# Altium PCB KC_BaseBoard4CompareTest-V0.2-XLR.PcbDoc
Units mil, origin at the board's own origin, x right, y up, seen from the top; angles counter-clockwise.
Board outline 7040 x 5160 mil, 2 copper layers (Top Layer, Bottom Layer); 70 components, 46 nets, 169 pads, 5 vias.
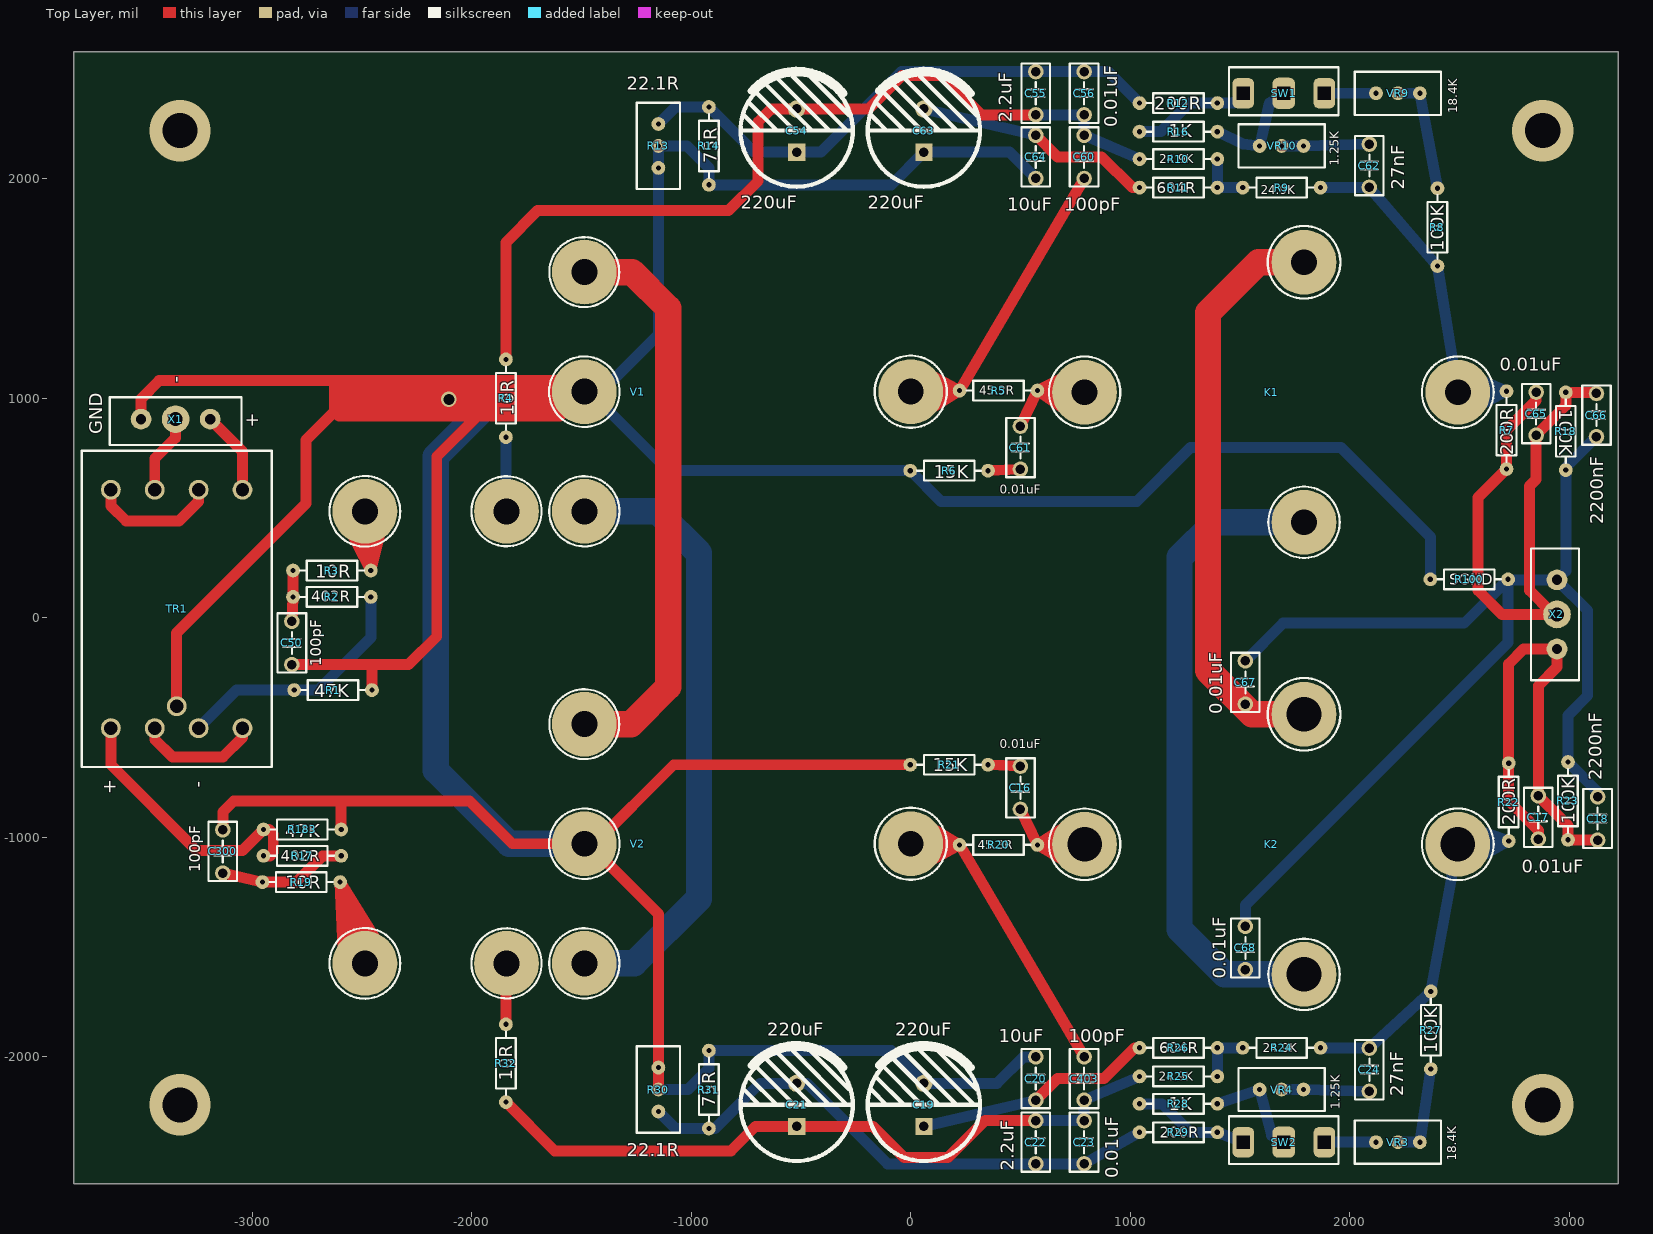
[diagram p0: Top Layer view]
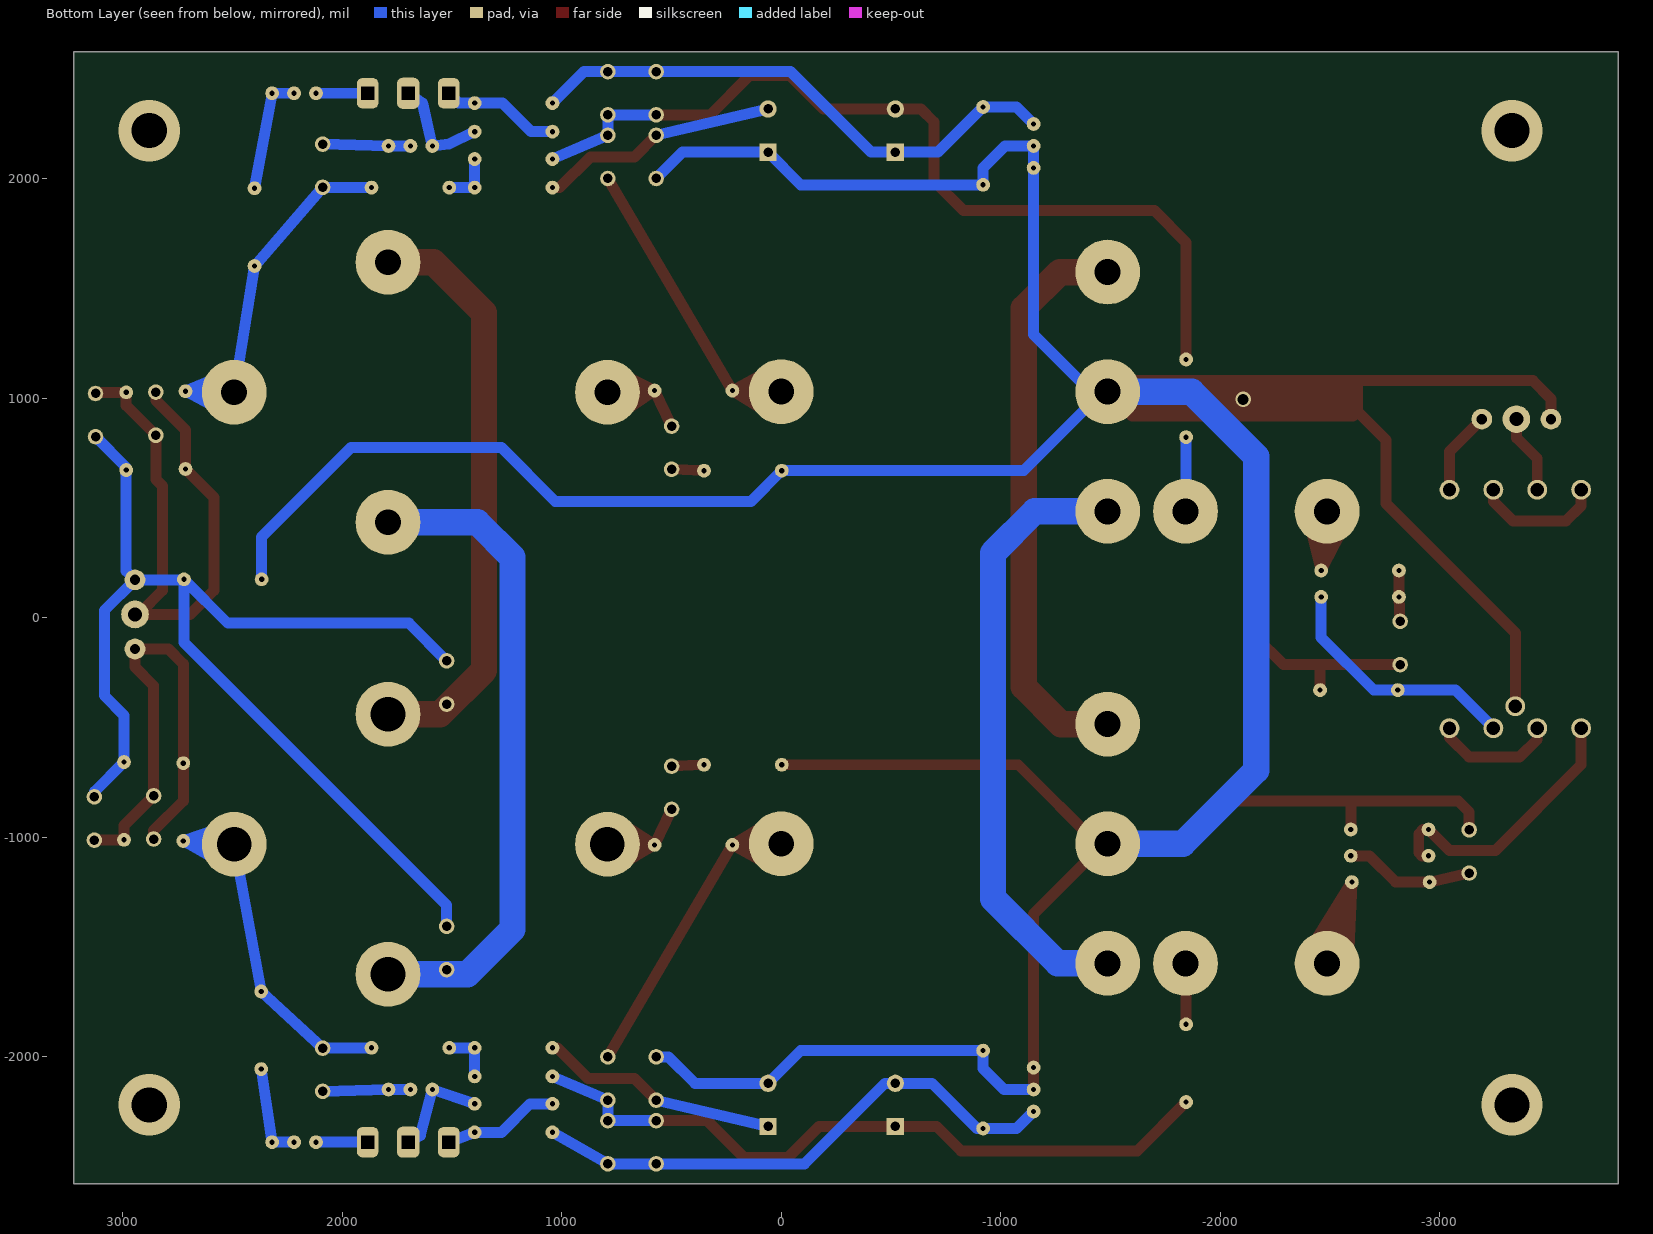
[diagram p1: Bottom Layer view, seen from below]

## Layer stack, top to bottom
Top Solder: solder mask 0.4, Solder Resist, Dk 3.5
Top Layer: signal copper 1.4
Dielectric 1: dielectric 12.6, FR-4, Dk 4.8
Bottom Layer: signal copper 1.4
Bottom Solder: solder mask 0.4, Solder Resist, Dk 3.5

## Board outline
-3815,-2580 -3815,2580 3225,2580 3225,-2580

## Design rules (kind name [scope] priority, off if disabled: settings)
Clearance [All] p1: gap=10 ignorepadtopadclearanceinfootprint=FALSE except(0: Arc-Hole Track-Hole SMDPad-Hole THPad-Hole Via-Hole Fill-Hole Poly-Hole Region-Hole Text-Hole)
PolygonConnect [All] p1: connectstyle=Relief reliefconductorwidth=10 reliefentries=4 polygonreliefangle="90 Angle" airgapwidth=10
RoomDefinition KC_BaseBoard4CompareTest-V0.2-XLR [InComponentClass('KC_BaseBoard4CompareTest-V0.2-XLR')] p1: confinementstyle=ConfineIn formatcopy=TRUE lockcomponents=FALSE outline 4912.5,-3983.74 23612.5,-3983.74 23612.5,1946.26 4912.5,1946.26
RoutingVias [All] p1: holewidth=28 width=50 viastyle="Through Hole" minholewidth=28 minwidth=50 maxholewidth=28 maxwidth=50
SolderMaskExpansion [All] p1: expansion=4
Width [All] p1: maxlimit=500 minlimit=10 preferedwidth=50
30 further rules are at their usual default settings.

## Components (designator, comment, footprint, x,y, rotation, side; value= is the part's Value field where it differs from the comment)
C16 "0.01uF" "CBB 6.3*6.3*5" 500,-775 r90 top
C17 "0.01uF" "CBB 6.3*6.3*5" 2860,-910 r270 top
C18 "2200nF" "CBB 6.3*6.3*5" 3130,-915 r90 top
C19 "220uF" "CAP 5.0*12.5*20" 60,-2220 r90 top
C20 "10uF" "CBB 6.3*6.3*5" 570,-2100 r90 top
C21 "220uF" "CAP 5.0*12.5*20" -520,-2220 r90 top
C22 "2.2uF" "CBB 6.3*6.3*5" 570,-2390 r270 top
C23 "0.01uF" "CBB 6.3*6.3*5" 790,-2390 r270 top
C24 "27nF" "CBB 6.3*6.3*5" 2090,-2060 r270 top
C50 "100pF" "CBB 6.3*6.3*5" -2820,-115 r90 top
C54 "220uF" "CAP 5.0*12.5*20" -520,2220 r90 top
C55 "2.2uF" "CBB 6.3*6.3*5" 570,2390 r270 top
C56 "0.01uF" "CBB 6.3*6.3*5" 790,2390 r270 top
C60 "100pF" "CBB 6.3*6.3*5" 790,2100 r270 top
C61 "0.01uF" "CBB 6.3*6.3*5" 500,775 r270 top
C62 "27nF" "CBB 6.3*6.3*5" 2090,2060 r270 top
C63 "220uF" "CAP 5.0*12.5*20" 60,2220 r90 top
C64 "10uF" "CBB 6.3*6.3*5" 570,2100 r90 top
C65 "0.01uF" "CBB 6.3*6.3*5" 2850,930 r90 top
C66 "2200nF" "CBB 6.3*6.3*5" 3125,923.43 r90 top
C67 "0.01uF" "CBB 6.3*6.3*5" 1525,-295 r90 top
C68 "0.01uF" "CBB 6.3*6.3*5" 1525,-1505 r90 top
C300 "100pF" "CBB 6.3*6.3*5" -3135,-1065 r270 top
C403 "100pF" "CBB 6.3*6.3*5" 790,-2100 r90 top
K1 "KCBuff" KCBuff 792.27,1027.5 r0 top
K2 "KCBuff" KCBuff_M4 792.27,-1032.5 r0 top
R1 "47K" "RS 1/4W" -2632.5,-330 r0 top
R2 "402R" "RS 1/4W" -2637.5,95 r180 top
R3 "10R" "RS 1/4W" -2637.5,215 r0 top
R4 "10R" "RS 1/4W" -1845,1000 r270 top
R5 "45.3R" "RS 1/4W" 400,1035 r0 top
R6 "15K" "RS 1/4W" 175,670 r180 top
R7 "200R" "RS 1/4W" 2715,855 r270 top
R8 "100K" "RS 1/4W" 2400,1780 r270 top
R9 "24.9K" "RS 1/4W" 1690,1960 r180 top
R10 "24.9K" "RS 1/4W" 1220,2090 r180 top
R11 "604R" "RS 1/4W" 1220,1960 r180 top
R12 "200R" "RS 1/4W" 1220,2345 r0 top
R13 "22.1R" "RS 1/2W-VR" -1150,2150 r270 top
R14 "75R" "RS 1/4W" -920,2150 r270 top
R16 "1K" "RS 1/4W" 1220,2215 r0 top
R17 "402R" "RS 1/4W" -2772.5,-1085 r0 top
R18 "100K" "RS 1/4W" 2985,850 r90 top
R19 "10R" "RS 1/4W" -2777.5,-1205 r0 top
R20 "45.3R" "RS 1/4W" 400,-1035 r0 top
R21 "15K" "RS 1/4W" 175,-670 r180 top
R22 "200R" "RS 1/4W" 2725,-840 r270 top
R23 "100K" "RS 1/4W" 2995,-835 r90 top
R24 "24.9K" "RS 1/4W" 1690,-1960 r0 top
R25 "24.9K" "RS 1/4W" 1220,-2090 r0 top
R26 "604R" "RS 1/4W" 1220,-1960 r0 top
R27 "100K" "RS 1/4W" 2370,-1880 r270 top
R28 "1K" "RS 1/4W" 1220,-2215 r0 top
R29 "200R" "RS 1/4W" 1220,-2345 r180 top
R30 "22.1R" "RS 1/2W-VR" -1150,-2150 r270 top
R31 "75R" "RS 1/4W" -920,-2150 r270 top
R32 "10R" "RS 1/4W" -1845,-2030 r90 top
R100 "SGND" "RS 1/4W" 2545,175 r0 top
R183 "47K" "RS 1/4W" -2772.5,-965 r180 top
SW1 "SW-3P-2S" SS-12D06 1700,2390 r0 top
SW2 "SW-3P-2S" SS-12D06 1700,-2390 r0 top
TR1 "LL1527" LL1527 -3345,40 r270 top
V1 "KCInputVas" KCIn_VAS -2487.5,485 r0 top
V2 "KCInputVas" KCIn_VAS -2487.5,-1575 r0 top
VR3 "18.4K" "RS 1/2W-VR" 2220,-2390 r180 top
VR4 "1.25K" "RS 1/2W-VR" 1690,-2150 r180 top
VR9 "18.4K" "RS 1/2W-VR" 2220,2390 r180 top
VR10 "1.25K" "RS 1/2W-VR" 1690,2150 r180 top
X1 "XLR" XLR-Male -3350,905 r180 top
X2 "XLR" XLR-Male 2945,15 r90 top

## Footprints (in the part's own frame and the unit in brackets; to place one, negate y for a bottom-side part, rotate by r counter-clockwise, add the part's x,y. Pads: shape width x height; smd on the part's side, far side on the other; paste and mask are expansions set on the pad)
"CAP 5.0*12.5*20" [mm] "脚距5mm直径12.5mm高度20mm"
  rect 2x2 hole 1.1: 1(-2.5,0)
  round 2 hole 1.1: 2(2.5,0)
  silkscreen extent -6.5,-6.5 6.99,6.5, body extent -6.25,-6.25 6.26,6.25, height 20.03
"CBB 6.3*6.3*5" [mm] "脚距5mm高6.3mm厚3mm"
  round 1.8 hole 1.1: 1(-2.5,0) 2(2.5,0)
  silkscreen extent -3.43,-1.65 3.43,1.65, body extent -3.15,-1.5 3.15,1.5, height 6.8
KCBuff [mm]
  round 7.5 hole 3: 1(0,0) 2(43.199,0) 3(25.397,15.049) 4(25.397,-15.05)
  silkscreen extent -4.13,-19.18 47.35,19.25
KCBuff_M4 [mm]
  round 7.5 hole 4: 1(0,0) 2(43.199,0) 3(25.397,15.05) 4(25.397,-15.05)
  silkscreen extent -4.13,-19.18 47.35,19.25
KCIn_VAS [mm]
  round 7.5 hole 3: 1(0,0) 2(16.396,0) 3(25.4,27.686) 4(25.4,0) 5(25.4,13.843) 6(63.182,13.843)
  silkscreen extent -4.09,-4.09 67.36,31.73
LL1527 [mm] "Lundahl LL1527"
  round 2.3 hole 1.55: 1(-13.8,-7.62) 2(-13.8,-2.54) 3(-13.8,2.54) 4(-13.8,7.62) 5(13.8,-7.62) 6(13.8,-2.54) 7(13.8,2.54) 8(13.8,7.62) 9(11.26,0)
  silkscreen extent -18.3,-11 18.3,11
"RS 1/2W-VR" [mm] "直插3脚顶调可调电阻，脚距2.54mm，长10mm*宽5mm*高10mm"
  round 1.6 hole 0.6: 1(-2.54,0) 2(2.54,0) 3(0,0)
  silkscreen extent -5,-2.5 5,2.5
"RS 1/4W" [mm] "直插色环电阻，脚距9mm，直径2.3mm"
  round 1.6 hole 0.6: 1(-4.5,0) 2(4.5,0)
  silkscreen extent -3.68,-1.14 3.68,1.14, body extent -4.72,-1.16 4.73,1.16, height 2.32
SS-12D06 [mm]
  rrect50% 2.5x3.5 hole 1.5 square: 1(-4.7,0) 3(4.7,0)
  rrect50% 2.6x3.6 hole 1.5 square: 2(0,0)
  silkscreen extent -6.35,-2.54 6.35,3
XLR-Male [mm] "XLR Male PCB Mount"
  round 2.4 hole 1.2: 1(4,0) 2(-4,0)
  round 3.2 hole 1.6: 3(0,0)
  silkscreen extent -7.62,-2.54 7.62,3

## Part data
C16 C17 C18 C19 C20 C21 C22 C23 C24 C50 C54 C55 C56 C60 C61 C62 C63 C64 C65 C66 C67 C68 C300 C403: library part C-CBB, "CBB电容", BOM名称=CBB电容, 学习资源=www.ooocke.com, 版权归属=源创客
K1 K2: "King Cello Buffer Stage"
R1 R2 R3 R4 R5 R6 R7 R8 R9 R10 R11 R12 R14 R16 R17 R18 R19 R20 R21 R22 R23 R24 R25 R26 R27 R28 R29 R31 R32 R100 R183: library part R-CRR, "直插色环电阻", BOM名称=色环电阻, 学习资源=www.ooocke.com, 版权归属=源创客
R13 R30 VR3 VR4 VR9 VR10: library part VR-W, "直插可调电阻-顶调"
SW1 SW2: "3 Pin 2 Switch"
TR1: "Lundahl LL1527"
V1 V2: "King Cello Input Stage and VAS"
X1 X2: "3 Pin XLR"

## Via types
v1: diameter 280, hole 160, Top Layer to Bottom Layer, 4 vias
v2: diameter 70, hole 50, Top Layer to Bottom Layer, 1 vias

## Nets (pads, with @x,y where several pads share a name; then routed paths per layer and width w, separated by ;. In a path a pad name is that pad's centre, name@x,y a point inside that pad or via, vN(x,y) a via of type N, cw(c..) or ccw(c..) an arc to the next point about the centre after c; other vN are vias at no path point)
NetC16_1: C16.1 K2.1 R20.2 | length 783.3
  Top Layer w50: C16.1 R20.2 ; K2.1@730,-935 728.93,-935.7 R20.2 ; K2.1@755,-1140 735.57,-1128.53 R20.2 ; K2.1 R20.2
NetC16_2: C16.2 R21.1 | length 148
  Top Layer w50: R21.1 C16.2
NetC17_1: C17.1 C17.2 C18.1 R22.1 R23.1 X2.2 | length 2201.7
  Top Layer w50: C17.2 2860,-970 2725,-835 R22.1 2725,-210 2792.52,-142.48 X2.2 2945,-225 2860,-310 C17.1 2995,-946.57 R23.1 3121.26,-1012.17 3125,-1008.43 C18.1
NetC18_2: C18.2 C66.1 C67.2 C68.2 R18.1 R23.2 R100.2 X2.1 | length 5519.7
  Bottom Layer w50: C68.2 1525,-1310 2722.17,-112.83 R100.2 ; C67.2 1696.57,-25 2522.17,-25 R100.2 ; C66.1 2985,685 R18.1 2985,212.48 X2.1 ; C18.2 3130,-792.83 R23.2 2995,-445 3085,-355 3085,32.48 X2.1 ; R100.2 2724.69,172.48 X2.1
NetC19_1: C19.1 C20.1 R26.1 | length 1095.5
  Top Layer w50: C20.1 668.43,-2100 880,-2100 1020,-1960 R26.1
  Bottom Layer w50: C19.1 C20.1
NetC19_2: C19.2 C20.2 C50.1 C63.1 C64.1 C300.1 R1.2 R6.2 R13.2 R13.3 R14.2 R21.2 R30.1 R30.3 R31.1 R100.1 R183.1 TR1.9 V1.5 V2.5 X1.1 | length 29125.5
  Top Layer w50: X1.1 -3507.48,997.52 -3425,1080 -2625,1080 ; TR1.9 -3345,-70 -2755,520 -2755,810 -2625,940 ; C300.1 -3135,-885 -3085,-835 -2595,-835 ; C50.1 -2455,-213.43 ; R183.1 -2595.33,-835.33 -2595,-835 ; -2570,965 V1.5@-1552.5,965 ; R1.2 -2455.33,-213.76 -2455,-213.43 ; V1.5@-1585,995 v2(-2105,995) -2570,995 -2625,940 ; V2.5@-1565,-1040 V2.5@-1460,-1040 ; R30.3 R30.1 -1150,-1350 V2.5@-1460,-1040 ; R21.2 -1080,-670 -1450,-1040 V2.5@-1460,-1040 ; -2625,940 V1.5@-1577.5,940 ; -2625,940 -2625,970 ; -2625,940 -2605,920 -1975,920 ; -2625,970 -2625,1080 ; -2625,970 -2565,1030 -2565,1045 ; -2625,1080 -2615,1080 ; -2615,1080 -1537.5,1080 V1.5 ; -2615,1080 -2580,1045 -2565,1045 ; -2595,-835 -2010,-835 -1815,-1030 V2.5 -1470,-1030 V2.5@-1460,-1040 ; -2565,1045 -2550,1030 V1.5 ; -2455,-213.43 -2288.43,-213.43 -2160,-85 -2160,735 -1975,920 ; -1975,920 -1597.5,920 V1.5@-1577.5,940 ; V1.5@-1577.5,940 V1.5@-1552.5,965 ; V1.5@-1552.5,965 V1.5
  Bottom Layer w50: V1.5 -1410,1030 -1150,1290 R13.2 R13.3 -1020,2150 -920,2050 R14.2 -88.74,1972.83 C63.1 450,2121.57 C64.1 ; V1.5@-1470,1005 -1440,1005 -1105,670 R6.2 137.83,530 1030,530 1275,775 1960,775 2367.83,367.17 R100.1 ; R30.3 -1015,-2150 -920,-2055 R31.1 -88.74,-1972.83 C19.2 393.42,-2121.58 513.43,-2001.57 C20.2
  Bottom Layer w120: V2.5 -1830,-1030 -2165,-695 -2165,735 -1870,1030 V1.5
NetC21_1: C21.1 C22.1 C23.1 C403.1 R25.1 R32.1 | length 3270.2
  Top Layer w50: R32.1 -1622.17,-2430 -820,-2430 -708.43,-2318.43 C21.1 -171.57,-2318.43 -30,-2460 170,-2460 338.43,-2291.57 C22.1
  Bottom Layer w50: C22.1 C23.1 C403.1 R25.1
NetC21_2: C21.2 C22.2 C23.2 R29.2 R30.2 R31.2 | length 2499.8
  Bottom Layer w50: R30.2 -1072.83,-2327.17 R31.2 -892.17,-2327.17 -686.58,-2121.58 C21.2 -473.42,-2121.58 -106.57,-2488.43 C22.2 C23.2 R29.2
NetC24_1: C24.1 K2.2 R22.2 R24.2 R27.1 | length 1886.7
  Bottom Layer w50: R24.2 C24.1 R27.1 K2.2 R22.2 ; K2.2@2545,-955 R22.2 ; K2.2@2570,-1105 R22.2
NetC24_2: C24.2 VR4.1 VR4.3 | length 400.1
  Bottom Layer w50: VR4.3 VR4.1 C24.2
NetC50_2: C50.2 R2.2 R3.1 | length 231.7
  Top Layer w50: C50.2 R2.2 R3.1
NetC54_1: C54.1 C55.1 C56.1 R12.1 R13.1 R14.1 | length 2521.3
  Bottom Layer w50: R13.1 -1072.83,2327.17 R14.1 -714.41,2121.57 C54.1 -408.42,2121.57 -41.58,2488.42 C55.1 C56.1 899.41,2488.43 R12.1
NetC54_2: C54.2 C55.2 C56.2 C60.1 R4.1 R10.2 | length 4083
  Top Layer w50: R4.1 -1845,1710 -1700,1855 -830,1855 -695,1990 -695,2260 -636.58,2318.42 C54.2 -191.58,2318.42 -40,2470 145,2470 323.43,2291.57 C55.2
  Bottom Layer w50: C55.2 C56.2 C60.1 R10.2
NetC60_2: C60.2 R5.1 V1.6 | length 1768
  Top Layer w50: V1.6 R5.1 ; V1.6@40,920 60.91,933.15 R5.1 ; V1.6@40,1135 53.42,1127.66 R5.1 ; C60.2 R5.1
NetC61_1: C61.1 K1.1 R5.2 | length 835.1
  Top Layer w50: C61.1 R5.2 ; K1.1@745,920 727.04,932.31 R5.2 ; K1.1@790,1140 747.18,1118.88 R5.2 ; K1.1 R5.2
NetC61_2: C61.2 R6.1 | length 148
  Top Layer w50: R6.1 C61.2
NetC62_1: C62.1 VR10.1 VR10.3 | length 400.1
  Bottom Layer w50: VR10.3 VR10.1 C62.1
NetC62_2: C62.2 K1.2 R7.1 R8.2 R9.1 | length 1855.6
  Bottom Layer w50: R9.1 C62.2 R8.2 K1.2 R7.1 ; K1.2@2540,1105 R7.1 ; K1.2@2570,955 R7.1
NetC63_2: C63.2 C64.2 R11.2 | length 1095.5
  Top Layer w50: C64.2 668.43,2100 870,2100 1010,1960 R11.2
  Bottom Layer w50: C63.2 C64.2
NetC65_1: C65.1 C65.2 C66.2 R7.2 R18.2 X2.3 | length 2681.7
  Top Layer w50: C65.2 2850,990 2715,855 R7.2 2585,547.83 2585,125 2695,15 X2.3 ; X2.3@2925,20 2820,125 2820,600 2850,630 C65.1 2985,966.57 R18.2 3119.69,1027.17 C66.2
  Bottom Layer w50: R18.2@2983.74,1028.43 R18.2
NetC67_1: C67.1 K1.3 K2.3 | length 2682.4
  Top Layer w120: K2.3 1555,-440 1355,-240 1355,1390 1585,1620 K1.3
NetC68_1: C68.1 K1.4 K2.4 | length 2980.5
  Bottom Layer w120: K2.4 1430,-1625 1225,-1420 1225,275 1385,435 K1.4
NetC300_2: C300.2 R17.2 R19.1 | length 594.1
  Top Layer w50: C300.2 R19.1 -2800,-1205 -2680,-1085 R17.2
NetC403_2: C403.2 R20.1 V2.6 | length 1783.3
  Top Layer w50: V2.6 R20.1 ; V2.6@25,-1145 54.75,-1128.46 R20.1 ; V2.6@40,-925 57.01,-935.24 R20.1 ; C403.2 R20.1
NetR1_1: R1.1 R2.1 TR1.7 | length 1141.1
  Bottom Layer w50: TR1.7 -3071.69,-330 R1.1 -2700,-330 -2460.33,-90.33 R2.1
NetR3_2: R3.2 V1.1 | length 710.9
  Top Layer w50: V1.1@-2555,400 R3.2 ; V1.1 R3.2 ; V1.1@-2405,440 R3.2
NetR4_2: R4.2 V1.2 | length 343.3
  Top Layer w50: V1.2@-1845,488 V1.2
  Bottom Layer w50: R4.2 -1845,488 V1.2
NetR8_1: R8.1 VR9.1 VR9.3 | length 540.2
  Bottom Layer w50: VR9.3 VR9.1 R8.1
NetR9_2: R9.2 R10.1 R11.1 | length 245.7
  Bottom Layer w50: R10.1 R11.1 R9.2
NetR12_2: R12.2 R16.1 SW1.1 | length 544.6
  Bottom Layer w50: R16.1 1140,2215 1270,2345 R12.2 1469.96,2345 SW1.1
NetR16_2: R16.2 SW1.2 VR10.2 | length 485.1
  Bottom Layer w50: R16.2 1514.69,2159.35 VR10.2 1635,2345 SW1.2
NetR17_1: R17.1 R183.2 TR1.5 | length 1251.7
  Top Layer w50: TR1.5 -3645,-670 -3255,-1060 -3044.67,-1060 R183.2 -2925,-965 -2905,-985 -2905,-1070 -2920,-1085 R17.1
NetR19_2: R19.2 V2.1 | length 1695.5
  Top Layer w50: V2.1@-2585,-1560 R19.2 ; V2.1@-2550,-1485 R19.2 ; V2.1 R19.2 ; V2.1@-2480,-1490 R19.2 ; V2.1@-2410,-1510 R19.2
NetR24_1: R24.1 R25.2 R26.2 | length 245.7
  Bottom Layer w50: R25.2 R26.2 R24.1
NetR27_2: R27.2 VR3.1 VR3.3 | length 436.6
  Bottom Layer w50: VR3.3 VR3.1 R27.2
NetR28_1: R28.1 R29.1 SW2.1 | length 534.3
  Bottom Layer w50: R28.1 1145,-2215 1275,-2345 R29.1 SW2.1
NetR28_2: R28.2 SW2.2 VR4.2 | length 483.2
  Bottom Layer w50: R28.2 VR4.2 1645,-2360 SW2.2
NetR32_2: R32.2 V2.2 | length 279.1
  Top Layer w50: R32.2 -1845,-1578 V2.2
NetSW1_3: SW1.3 VR9.2 | length 235
  Bottom Layer w50: SW1.3 VR9.2
NetSW2_3: SW2.3 VR3.2 | length 235
  Bottom Layer w50: SW2.3 VR3.2
NetTR1_1: TR1.1 TR1.3 | length 592.9
  Top Layer w50: TR1.1 -3645,510 -3575,440 -3335,440 -3245,530 TR1.3
NetTR1_2: TR1.2 X1.3 | length 361
  Top Layer w50: TR1.2 -3445,725 -3350,820 X1.3
NetTR1_4: TR1.4 X1.2 | length 382.8
  Top Layer w50: X1.2 -3045,757.48 TR1.4
NetTR1_6: TR1.6 TR1.8 | length 563.8
  Top Layer w50: TR1.6 -3445,-555 -3365,-635 -3135,-635 -3045,-545 TR1.8
NetV1_3: V1.3 V2.3 | length 2628.8
  Top Layer w120: V2.3 -1275,-485 -1105,-315 -1105,1410 -1270,1575 V1.3
NetV1_4: V1.4 V2.4 | length 2820.9
  Bottom Layer w120: V2.4 -1260,-1575 -965,-1280 -965,295 -1155,485 V1.4
copper on no net:
  other v1: -3330,-2220 2880,-2220 -3330,2220 2880,2220

## Silkscreen, mask and mechanical layers (free items; w line width, h text height)
Top Overlay:
  text "-" at -3365,1100 h60 r270
  text "+" at -3025,935 h60 r270
  text "GND" at -3685,835 h60 r90
  text "+" at -3675,-735 h60 r270
  text "-" at -3265,-745 h60 r270
Drill Drawing:
  the board outline again, w10